# EAGLE board Cooling (EAGLE 7.6.0)
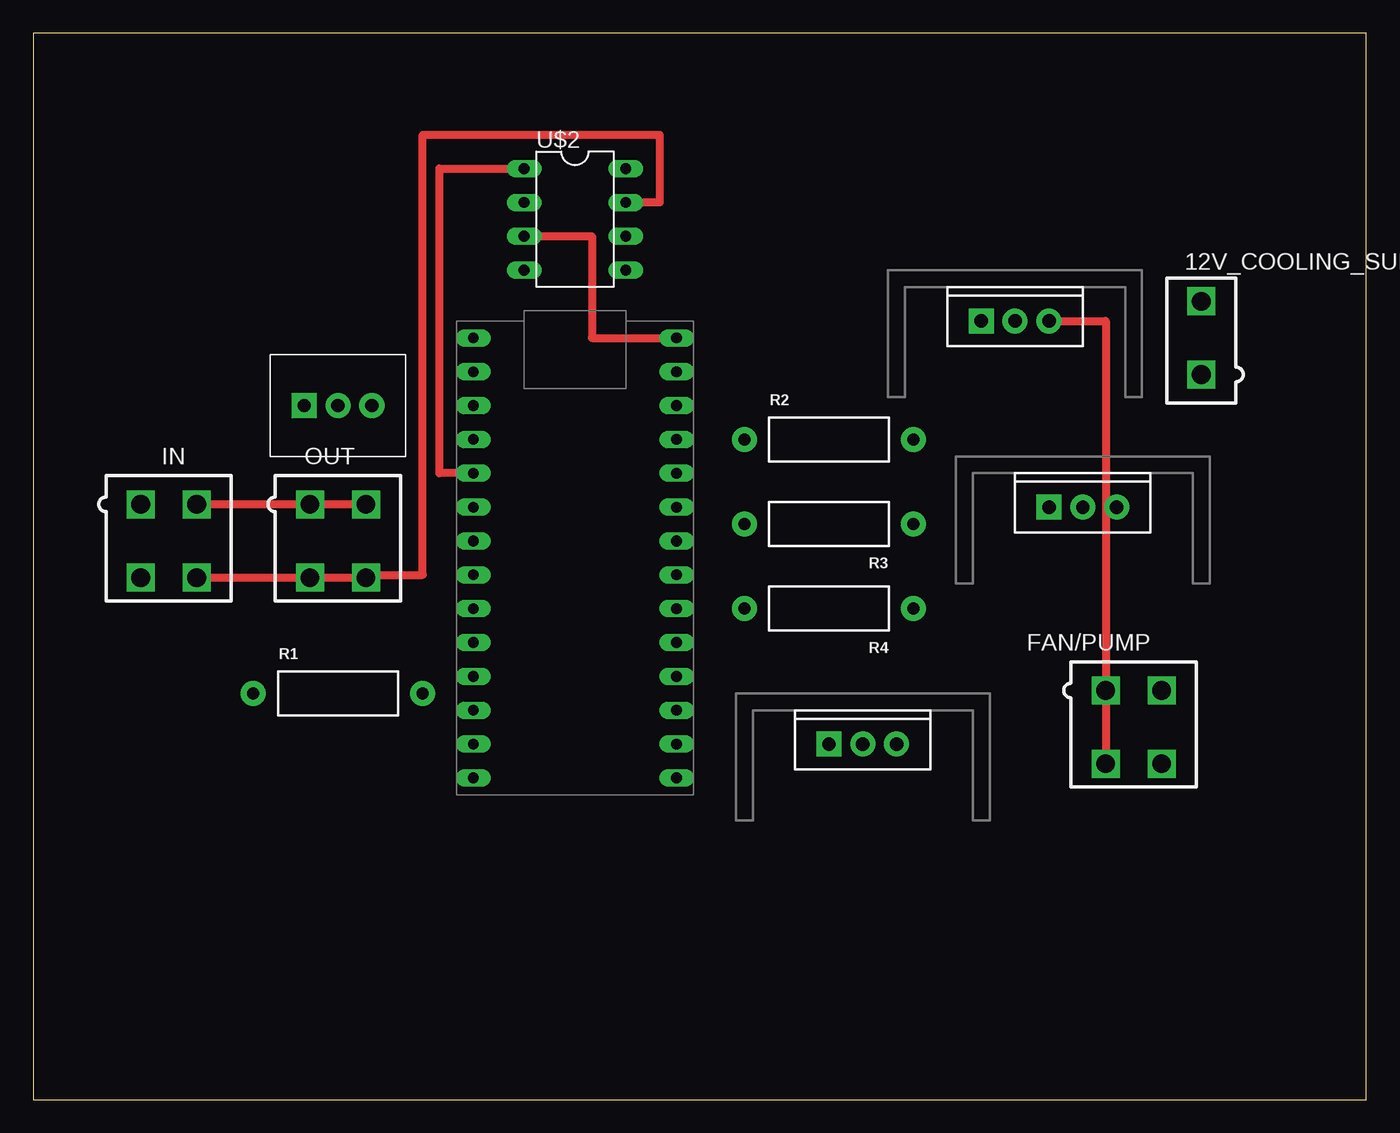
[diagram p0: board, top side]
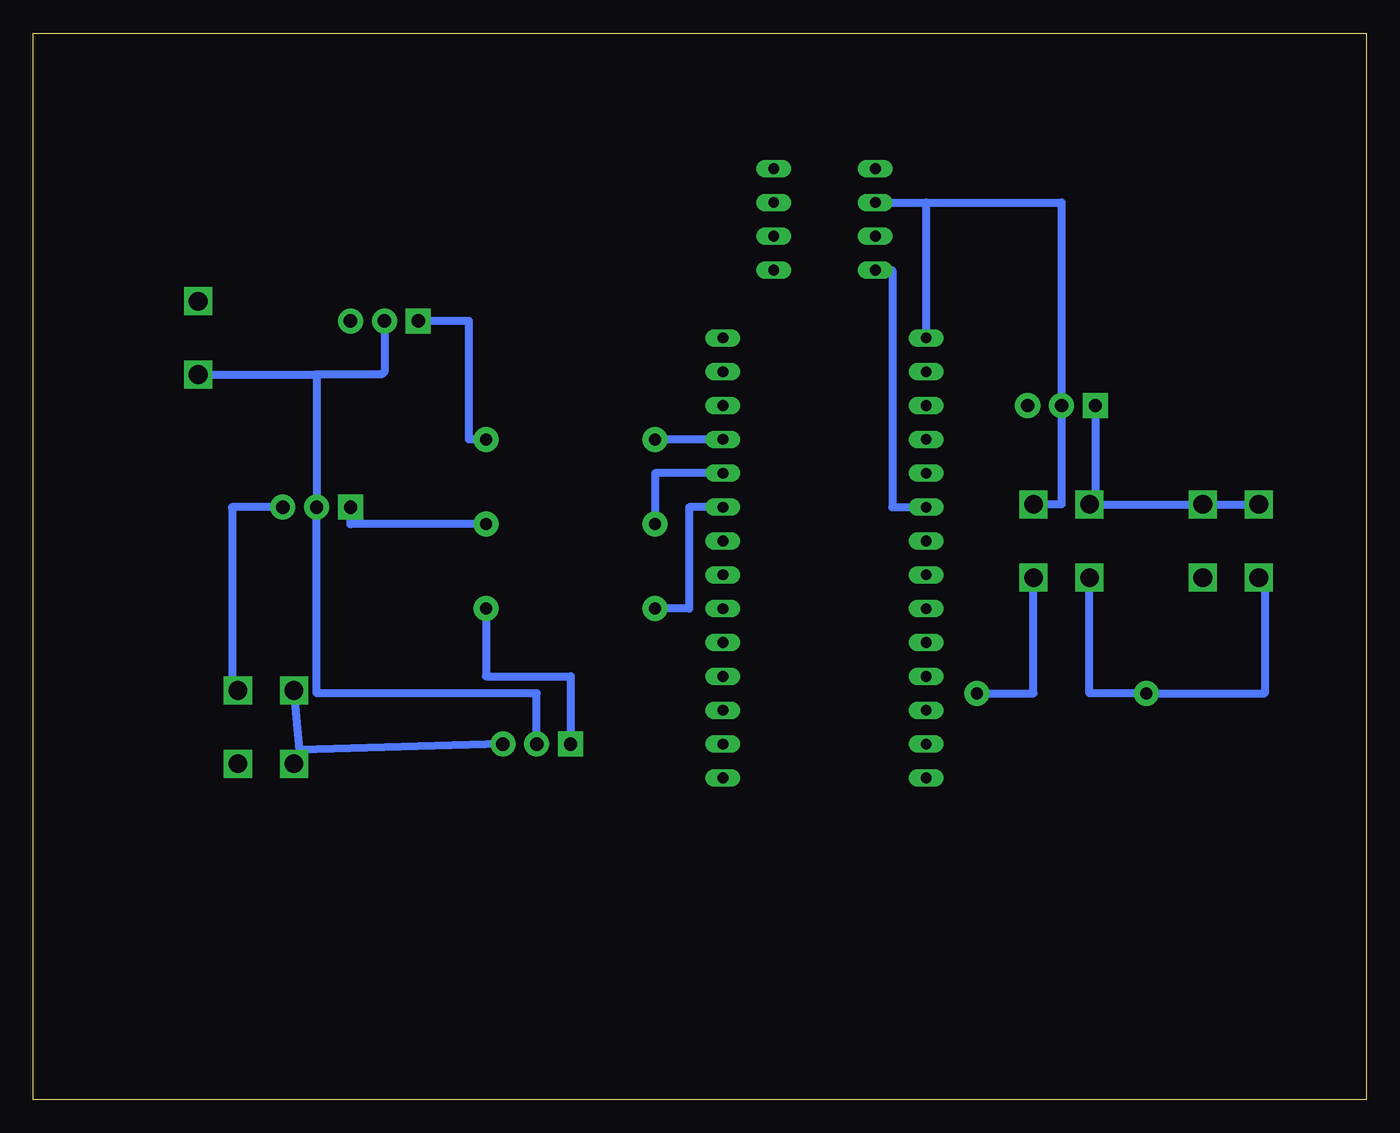
[diagram p1: board, bottom side, seen from below]

Size 100 x 80 mm. Coordinates in mm from the lower left corner, seen from the top.
Outline: 0,0 100,0 100,80 0,80 0,0
Copper layers (1*16): Top 0.035mm / dielectric 1.5mm / Bottom 0.035mm
Design rules "default": minimum track width 10mil, minimum drill 24mil, track to track 8mil, track to pad 8mil, pad to pad 8mil, via to via 8mil, smd to smd 8mil, copper to edge 40mil, drill to drill 8mil, minimum pad ring 10mil, minimum via ring 8mil, stop-mask expansion 4mil, vias tented up to drill 0mil, thermal gap 10mil

## Footprints (pad centres in the part's own frame; a part is rotated, then mirrored left to right if it is on the bottom)
MINIFIT_5566-2 = drill 1.4 square: 1 0,-2.75; 2 0,2.75
MINIFIT_5566-4 = drill 1.4 square: 1 2.1,-2.75; 2 -2.1,-2.75; 3 2.1,2.75; 4 -2.1,2.75
TO-220 = drill 1 pad 1.88 square: 1 -2.54,0 | drill 1 pad 1.88: 2 0,0; 3 2.54,0
TO-220-SINK = drill 1 pad 1.88 square: 1 -2.54,0 | drill 1 pad 1.88: 2 0,0; 3 2.54,0
AXIAL-0.5 = drill 0.9 pad 1.88: P$1 -6.35,0; P$2 6.35,0
TEENSY_3.2_SIMPLE = drill 0.8 long: 3.3V 16.51,29.21; A0 16.51,3.81; A1 16.51,6.35; A2 16.51,8.89; A3 16.51,11.43; A4 16.51,13.97; A5 16.51,16.51; A6 16.51,19.05; A7 16.51,21.59; A8 16.51,24.13; A9 16.51,26.67; AGND 16.51,31.75; D0(RX1) 1.27,31.75; D1(TX1) 1.27,29.21; D2 1.27,26.67; D3(CANTX) 1.27,24.13; D4(CANRX) 1.27,21.59; D5 1.27,19.05; D6 1.27,16.51; D7(RX3) 1.27,13.97; D8(TX3) 1.27,11.43; D9(RX2) 1.27,8.89; D10(TX2) 1.27,6.35; D11 1.27,3.81; D12 1.27,1.27; D13 16.51,1.27; GND 1.27,34.29; VIN 16.51,34.29
DIL08 = drill 0.813 long: 1 -3.81,-3.81; 2 -1.27,-3.81; 3 1.27,-3.81; 4 3.81,-3.81; 5 3.81,3.81; 6 1.27,3.81; 7 -1.27,3.81; 8 -3.81,3.81

## Placement (x,y rotation side)
12V_COOLING_SUPPLY  MINIFIT_5566-2  [MINIFIT_5566-2]  87.63,57.15 0 top
FAN/PUMP  MINIFIT_5566-4  [MINIFIT_5566-4]  82.55,27.94 180 top
IC1  [TO-220]  22.86,52.07 0 top
IN  MINIFIT_5566-4  [MINIFIT_5566-4]  10.16,41.91 180 top
OUT  MINIFIT_5566-4  [MINIFIT_5566-4]  22.86,41.91 180 top
Q1  [TO-220-SINK]  73.66,58.42 0 top
Q2  [TO-220-SINK]  78.74,44.45 0 top
Q3  [TO-220-SINK]  62.23,26.67 0 top
R1  [AXIAL-0.5]  22.86,30.48 0 top
R2  [AXIAL-0.5]  59.69,49.53 0 top
R3  [AXIAL-0.5]  59.69,43.18 180 top
R4  [AXIAL-0.5]  59.69,36.83 180 top
U$1  TEENSY_3.2_SIMPLE  [TEENSY_3.2_SIMPLE]  31.75,22.86 0 top
U$2  MCP2551  [DIL08]  40.64,66.04 270 top

## Library data of the parts
12V_COOLING_SUPPLY = HyTechDevices; OC_FARNELL: 1822072; OC_NEWARK: unknown
FAN/PUMP IN OUT = HyTechDevices; OC_FARNELL: unknown; OC_NEWARK: unknown
IC1 Q1-Q3 R1-R4 U$1 U$2 = HyTechDevices

## Nets
5V: U$1.VIN U$2.3
12V: IC1.1 IN.1 OUT.1
12V_COOLING_SUPPLY: 12V_COOLING_SUPPLY.1 Q1.2 Q2.2 Q3.2
FAN1: FAN/PUMP.1 Q3.3
FAN2: FAN/PUMP.2 Q2.3
GND: IC1.2 IN.2 OUT.2 U$1.GND U$2.2
N$1: R4.P$2 U$1.A7
N$2: U$1.D3(CANTX) U$2.1
N$3: U$1.D4(CANRX) U$2.4
N$5: U$2.6
N$6: Q3.1 R4.P$1
N$7: Q1.1 R2.P$2
N$8: IN.3 OUT.3 R1.P$1
N$9: R2.P$1 U$1.A9
N$11: IN.4 OUT.4 R1.P$2 U$2.7
N$12: R3.P$2 U$1.A8
N$17: Q2.1 R3.P$1
PUMP: FAN/PUMP.3 Q1.3

## Tracks (layer width: path | path; a pad name or v marks a point on that pad's centre or on a via)
5V
  Top 0.61: U$2.3 41.91,64.77 41.91,57.15 U$1.VIN
12V
  Bottom 0.406: 20.32,45.1 OUT.1
  Bottom 0.61: IC1.1 20.32,45.1 | OUT.1 IN.1
12V_COOLING_SUPPLY
  Bottom 0.61: 12V_COOLING_SUPPLY.1 78.74,54.4 | 78.74,54.4 Q2.2 78.74,30.48 62.23,30.48 Q3.2 | Q1.2 73.66,54.61 73.87,54.4 78.74,54.4
FAN1
  Bottom 0.61: Q3.3 80.01,26.23 FAN/PUMP.1
FAN2
  Bottom 0.61: Q2.3 85.09,44.45 85.09,31.31 FAN/PUMP.2
GND
  Top 0.61: OUT.2 IN.2
  Bottom 0.406: U$2.2 33.02,67.31
  Bottom 0.61: 33.02,67.31 U$1.GND | U$2.2 22.86,67.31 IC1.2 22.86,44.66 OUT.2
N$1
  Bottom 0.61: U$1.A7 50.8,44.45 50.8,36.83 R4.P$2
N$2
  Top 0.61: U$1.D3(CANTX) 30.48,46.99 30.48,69.85 U$2.1
N$3
  Bottom 0.61: U$2.4 35.56,62.23 35.56,44.45 U$1.D4(CANRX)
N$6
  Bottom 0.61: R4.P$1 66.04,31.75 59.69,31.75 Q3.1
N$7
  Bottom 0.61: R2.P$2 67.31,49.53 67.31,58.42 Q1.1
N$8
  Bottom 0.61: OUT.3 20.76,30.48 R1.P$1 7.62,30.48 7.62,39.16 IN.3
N$9
  Bottom 0.61: U$1.A9 R2.P$1
N$11
  Top 0.406: OUT.4 24.96,39.37
  Top 0.61: IN.4 OUT.4 | 24.96,39.37 29.21,39.37 29.21,72.39 46.99,72.39 46.99,67.31 U$2.7
  Bottom 0.61: R1.P$2 24.96,30.48 OUT.4
N$12
  Bottom 0.61: U$1.A8 53.34,46.99 R3.P$2
N$17
  Bottom 0.61: R3.P$1 76.2,43.18 Q2.1
PUMP
  Top 0.61: Q1.3 80.45,58.42 FAN/PUMP.3